# EAGLE board deska (EAGLE 7.7.0)
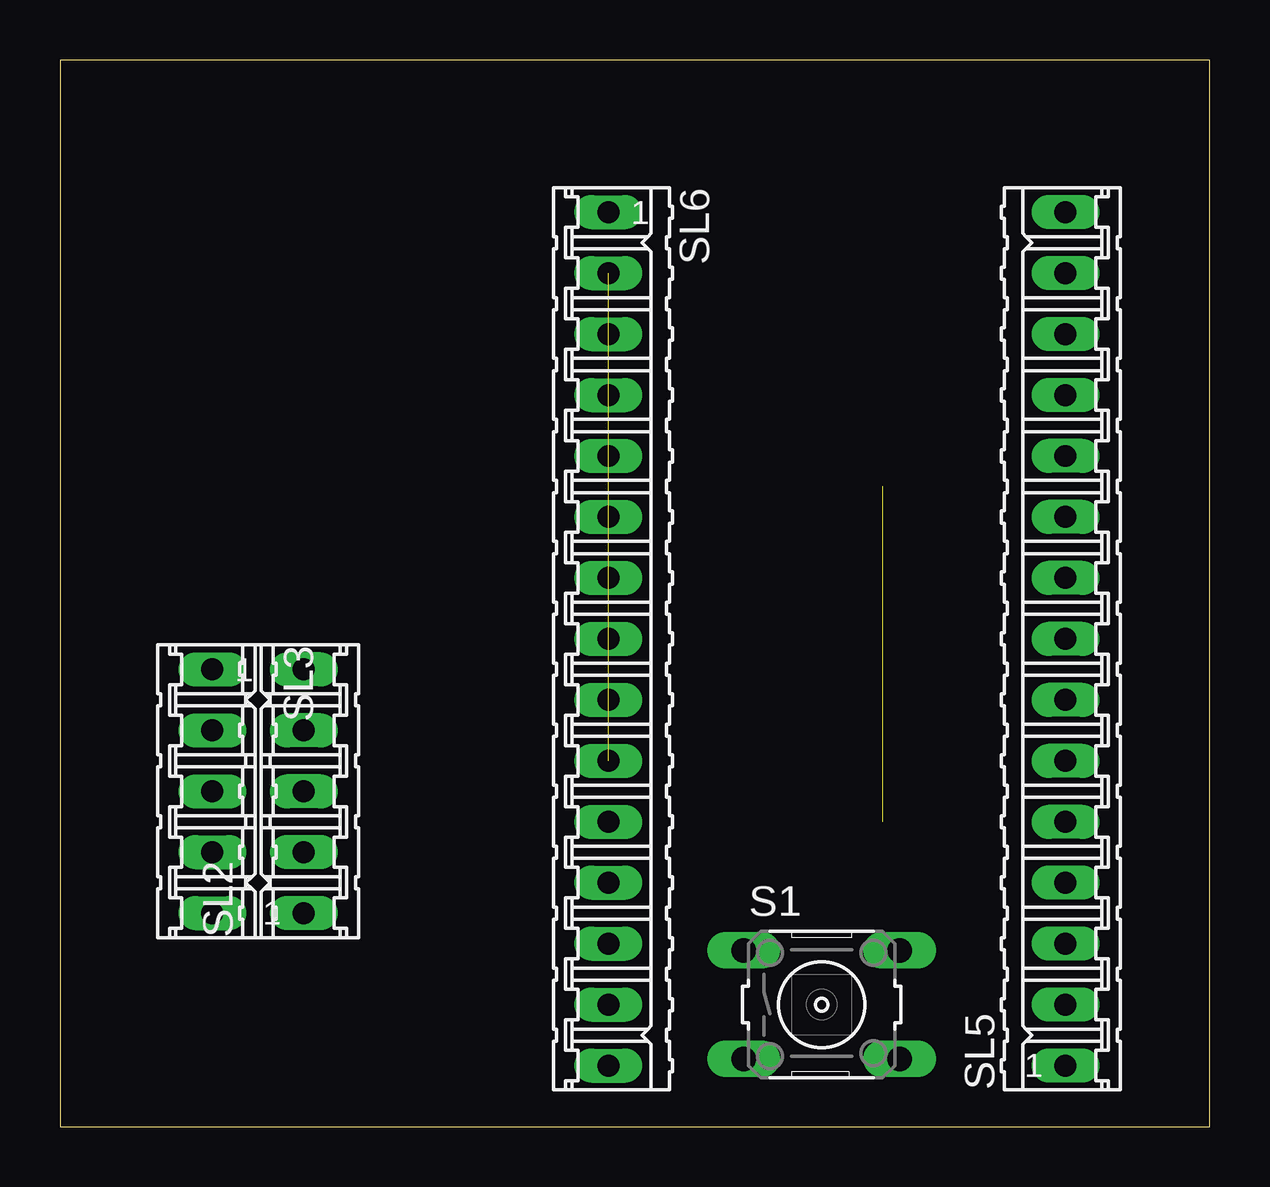
[diagram p0: board, top side]
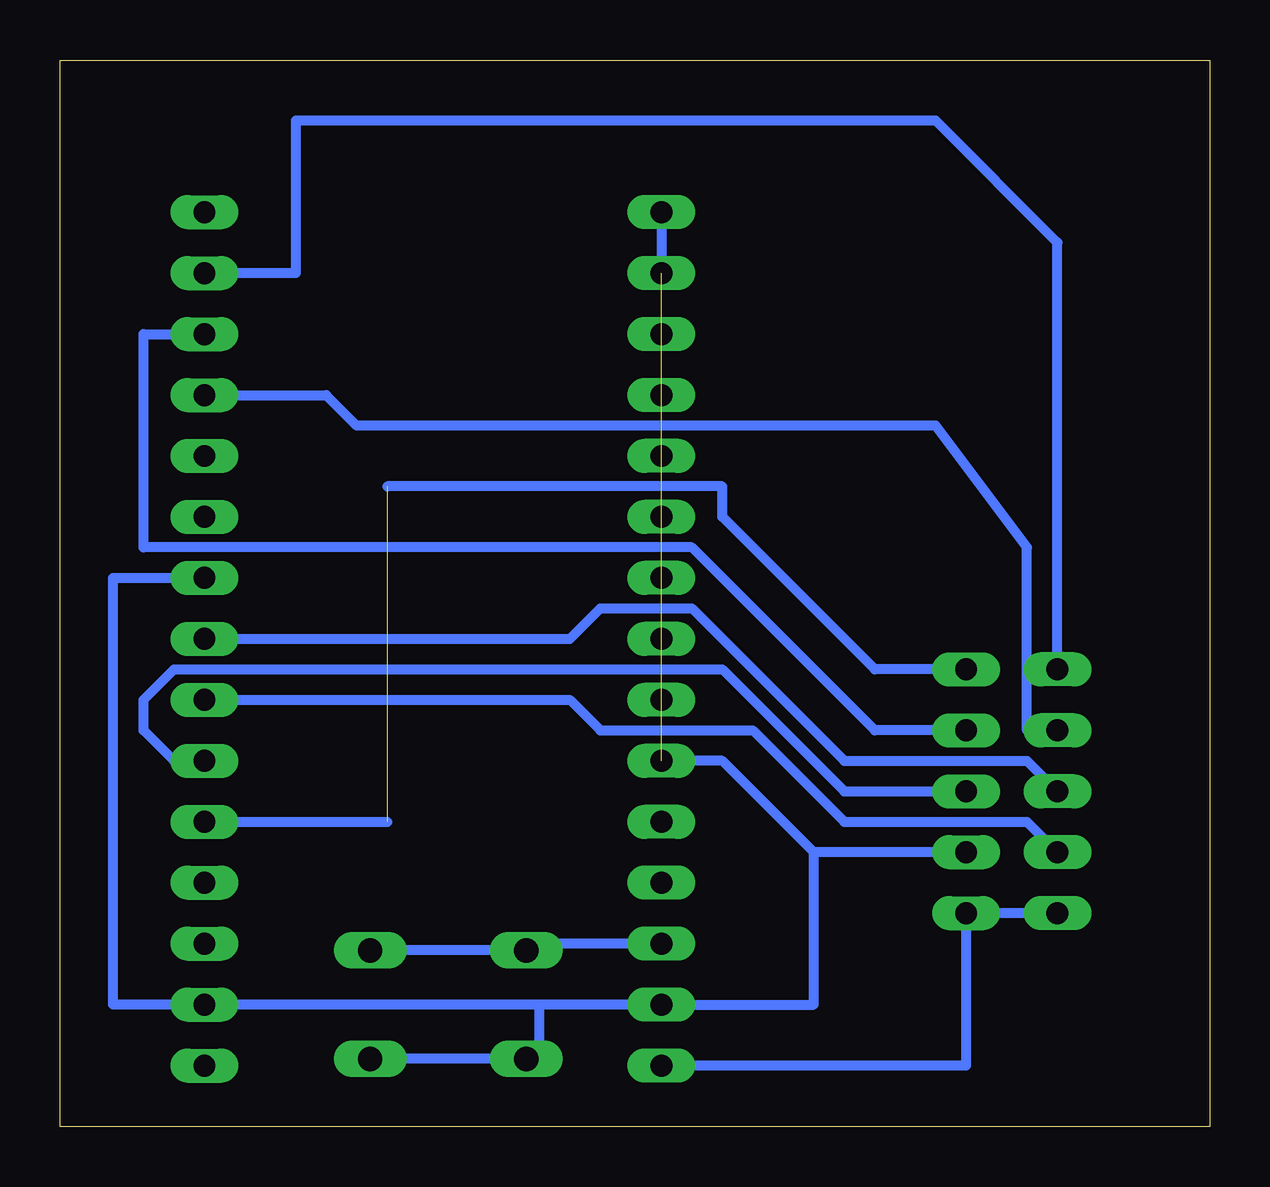
[diagram p1: board, bottom side, seen from below]

Size 47.93 x 44.44 mm. Coordinates in mm from the lower left corner, seen from the top.
Outline: 0,0 47.93,0 47.93,44.44 0,44.44 0,0
Copper layers (1*16): Top 0.035mm / dielectric 1.5mm / Bottom 0.035mm
Design rules "default": minimum track width 10mil, minimum drill 24mil, track to track 8mil, track to pad 8mil, pad to pad 8mil, via to via 8mil, smd to smd 8mil, copper to edge 40mil, drill to drill 8mil, minimum pad ring 10mil, minimum via ring 8mil, stop-mask expansion 4mil, vias tented up to drill 0mil, thermal gap 10mil

## Footprints (pad centres in the part's own frame; a part is rotated, then mirrored left to right if it is on the bottom)
B3F-10XX = drill 1.016 long: 1 -3.251,2.261; 2 3.251,2.261; 3 -3.251,-2.261; 4 3.251,-2.261
05P = drill 0.914 long: 1 -5.08,0; 2 -2.54,0; 3 0,0; 4 2.54,0; 5 5.08,0
15P = drill 0.914 long: 1 -17.78,0; 2 -15.24,0; 3 -12.7,0; 4 -10.16,0; 5 -7.62,0; 6 -5.08,0; 7 -2.54,0; 8 0,0; 9 2.54,0; 10 5.08,0; 11 7.62,0; 12 10.16,0; 13 12.7,0; 14 15.24,0; 15 17.78,0

## Placement (x,y rotation side)
S1  [B3F-10XX]  31.75,5.08 0 top
SL2  [05P]  10.16,13.97 90 top
SL3  [05P]  6.35,13.97 270 top
SL5  [15P]  41.91,20.32 90 top
SL6  [15P]  22.86,20.32 270 top

## Library data of the parts
S1 = switch-omron; MPN: B3F-1000; OC_FARNELL: 176432; OC_NEWARK: 36M3542
SL2 SL3 SL5 SL6 = con-amp-quick; OC_FARNELL: unknown; OC_NEWARK: unknown

## Nets
+5V: SL2.1 SL3.5 SL6.15
GND: S1.3 S1.4 SL2.2 SL5.2 SL5.9 SL6.1 SL6.2 SL6.10 SL6.14
N$1: SL3.1 SL5.14
N$2: SL2.5 SL5.5
N$3: SL3.2 SL5.12
N$4: SL2.4 SL5.13
N$5: SL3.3 SL5.8
N$6: SL2.3 SL5.6
N$7: SL3.4 SL5.7
N$10: S1.1 S1.2 SL6.13

## Tracks (layer width: path | path; a pad name or v marks a point on that pad's centre or on a via)
+5V
  Bottom 0.406: SL3.5 SL2.1 10.16,2.54 SL6.15
GND  (1 unrouted)
  Bottom 0.406: 27.94,5.08 SL6.14 16.51,5.08 16.51,11.43 | 27.94,5.08 SL5.2 45.72,5.08 45.72,22.86 SL5.9 | SL6.1 SL6.2 | SL2.2 16.51,11.43 | 16.51,11.43 20.32,15.24 SL6.10 | 27.94,5.08 27.94,3.38 S1.3 S1.4
N$1
  Bottom 0.406: SL3.1 6.35,36.83 11.43,41.91 38.1,41.91 38.1,35.56 SL5.14
N$2  (1 unrouted)
  Bottom 0.406: 34.29,26.67 20.32,26.67 20.32,25.4 13.97,19.05 SL2.5 | SL5.5 34.29,12.7
N$3
  Bottom 0.406: SL3.2 7.62,16.51 7.62,24.13 11.43,29.21 35.56,29.21 36.83,30.48 SL5.12
N$4
  Bottom 0.406: SL2.4 13.97,16.51 21.59,24.13 44.45,24.13 44.45,33.02 SL5.13
N$5
  Bottom 0.406: SL3.3 7.62,15.24 15.24,15.24 21.59,21.59 25.4,21.59 26.67,20.32 SL5.8
N$6
  Bottom 0.406: SL5.6 43.18,15.24 44.45,16.51 44.45,17.78 43.18,19.05 20.32,19.05 15.24,13.97 SL2.3
N$7
  Bottom 0.406: SL5.7 26.67,17.78 25.4,16.51 19.05,16.51 15.24,12.7 7.62,12.7 SL3.4
N$10
  Bottom 0.406: SL6.13 28.22,7.62 S1.1 S1.2